# Altium PCB PCB1.PcbDoc
Units mil, origin at the board's own origin, x right, y up, seen from the top; angles counter-clockwise.
Board outline 6000 x 4000 mil, 2 copper layers (Top Layer, Bottom Layer); 8 components, 13 nets, 80 pads, 0 vias.
Unrouted connection lines stored in the file: 24.
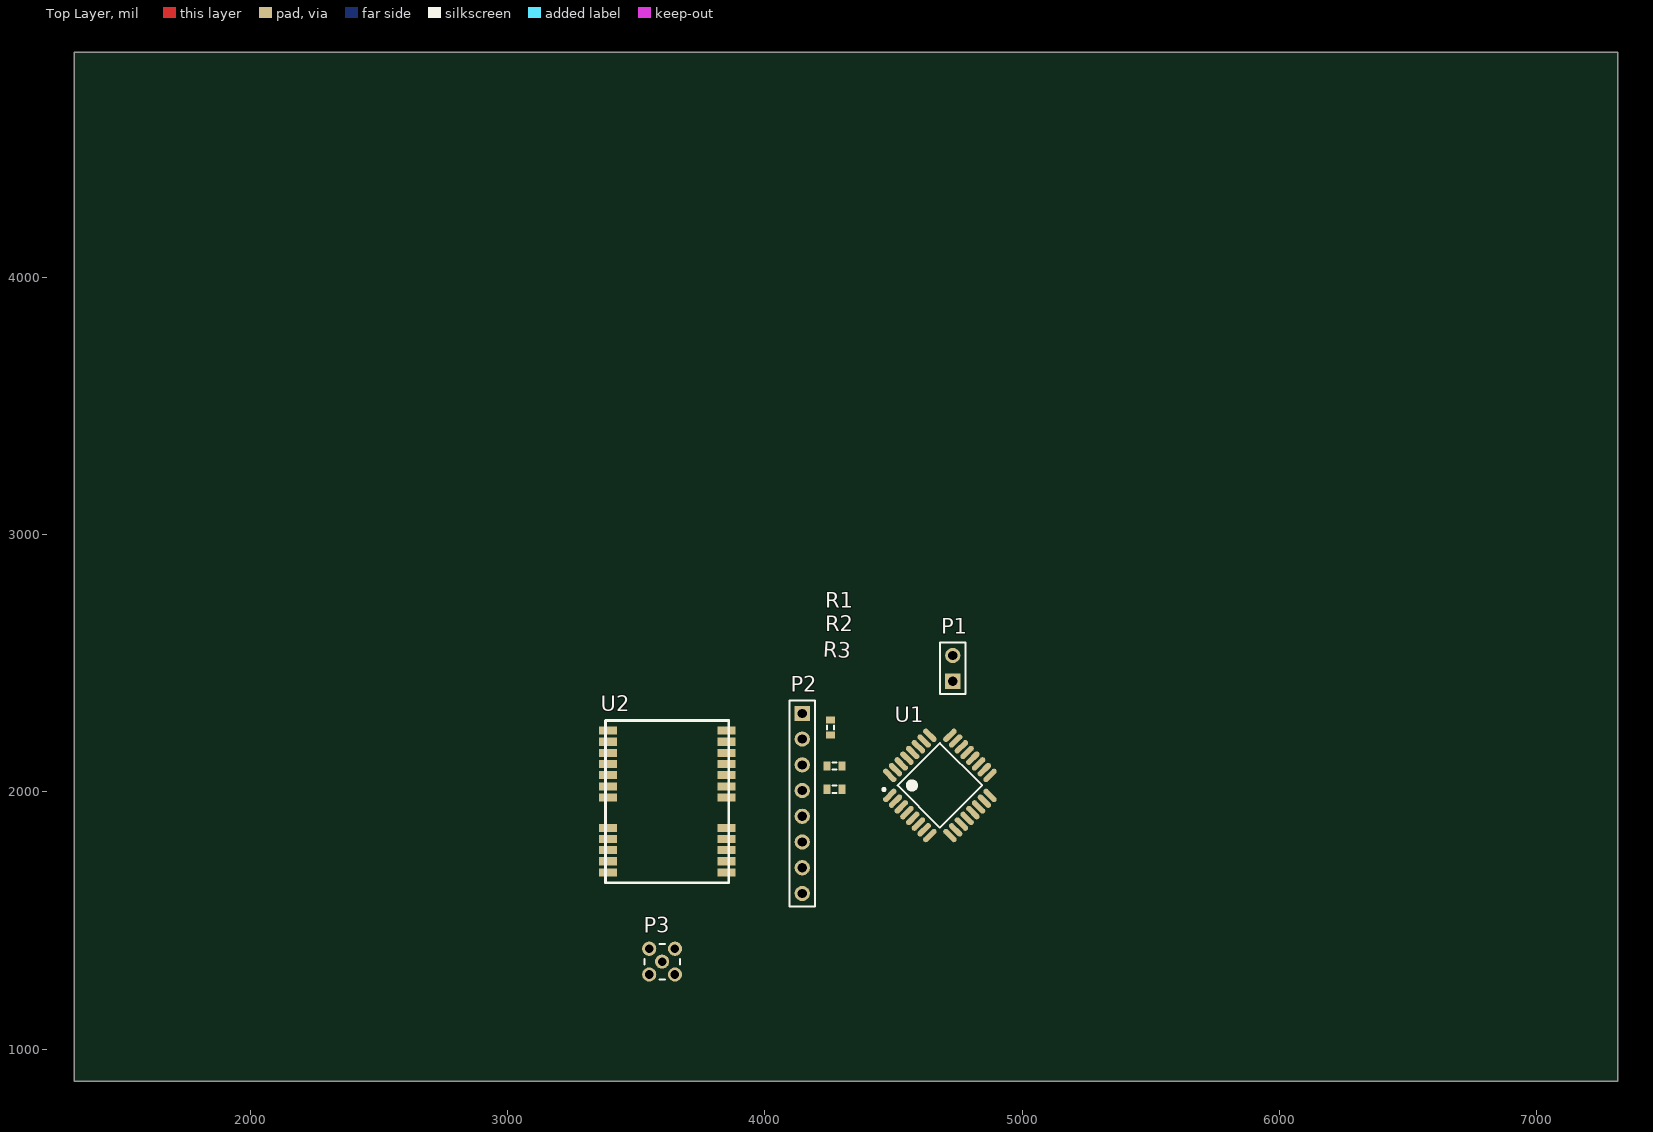
[diagram p0: Top Layer view]
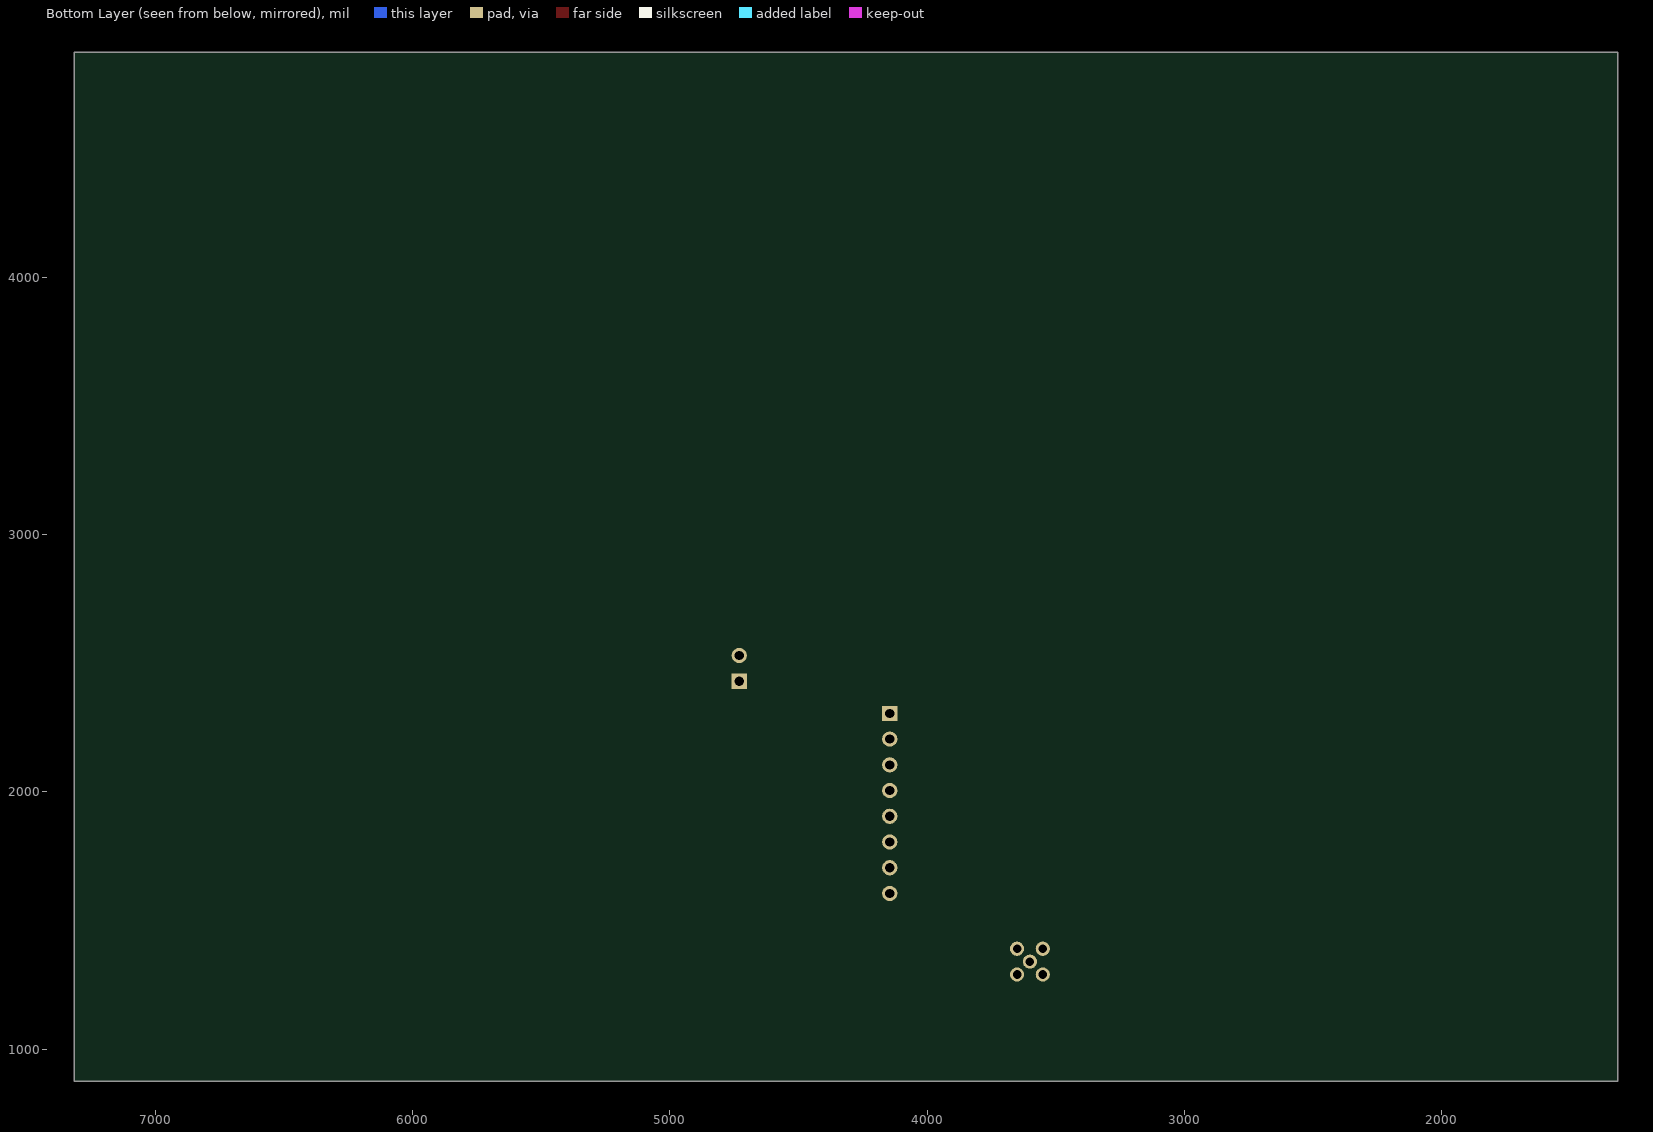
[diagram p1: Bottom Layer view, seen from below]

## Layer stack, top to bottom
Top Solder: solder mask 0.4, Solder Resist, Dk 3.5
Top Layer: signal copper 1.4
Dielectric 1: dielectric 12.6, FR-4, Dk 4.8
Bottom Layer: signal copper 1.4
Bottom Solder: solder mask 0.4, Solder Resist, Dk 3.5

## Board outline
1315,875 7315,875 7315,4875 1315,4875

## Design rules (kind name [scope] priority, off if disabled: settings)
Clearance [All] p1: gap=10 ignorepadtopadclearanceinfootprint=FALSE except(0: Arc-Hole Track-Hole SMDPad-Hole THPad-Hole Via-Hole Fill-Hole Poly-Hole Region-Hole Text-Hole)
PolygonConnect [All] p1: connectstyle=Relief reliefconductorwidth=10 reliefentries=4 polygonreliefangle="90 Angle" airgapwidth=10
RoutingVias [All] p1: holewidth=28 width=50 viastyle="Through Hole" minholewidth=28 minwidth=50 maxholewidth=28 maxwidth=50
SolderMaskExpansion [All] p1: expansion=4
Width [All] p1: maxlimit=10 minlimit=10 preferedwidth=10
30 further rules are at their usual default settings.

## Components (designator, comment, footprint, x,y, rotation, side; value= is the part's Value field where it differs from the comment)
P1 "Header 2" HDR1X2 4730,2430 r90 top
P2 "Programming" HDR1X8 4145,2305 r270 top
P3 "COAX-M" MMCX2.54-V5 3600,1340 r0 top
R1 "Res3" J1-0603 4255,2250 r270 top value=1K
R2 "Res3" J1-0603 4270,2100 r180 top value=1K
R3 "Res3" J1-0603 4270,2010 r180 top value=1K
U1 "ATmega8L-8AU" 32A_N 4680,2025 r45 top
U2 "uBlox NEO-6Q" NEO_6 3380,2277.32 r180 top

## Footprints (in the part's own frame and the unit in brackets; to place one, negate y for a bottom-side part, rotate by r counter-clockwise, add the part's x,y. Pads: shape width x height; smd on the part's side, far side on the other; paste and mask are expansions set on the pad)
32A_N [mm] "Thin QFP, 32-Leads, Body 7x7mm, Pitch 0.8mm, IPC Medium Density"
  oval 1.65x0.55 smd: 1(-4.2,2.8) 2(-4.2,2) 3(-4.2,1.2) 4(-4.2,0.4) 5(-4.2,-0.4) 6(-4.2,-1.2) 7(-4.2,-2) 8(-4.2,-2.8) 17(4.2,-2.8) 18(4.2,-2) 19(4.2,-1.2) 20(4.2,-0.4) 21(4.2,0.4) 22(4.2,1.2) 23(4.2,2) 24(4.2,2.8)
  oval 0.55x1.65 smd: 9(-2.8,-4.2) 10(-2,-4.2) 11(-1.2,-4.2) 12(-0.4,-4.2) 13(0.4,-4.2) 14(1.2,-4.2) 15(2,-4.2) 16(2.8,-4.2) 25(2.8,4.2) 26(2,4.2) 27(1.2,4.2) 28(0.4,4.2) 29(-0.4,4.2) 30(-1.2,4.2) 31(-2,4.2) 32(-2.8,4.2)
  silkscreen extent -4.32,-2.95 2.95,3.75, body extent -3.5,-3.5 3.5,3.5, height 1.2
HDR1X2 [mm] "Connector; Header; 2 Position"
  rect 1.5x1.5 hole 0.9: 1(0,0)
  round 1.5 hole 0.9: 2(2.54,0)
  silkscreen extent -1.27,-1.27 3.81,1.27
HDR1X8 [mm] "Connector; Header; 8 Position"
  rect 1.5x1.5 hole 0.9: 1(0,0)
  round 1.5 hole 0.9: 2(2.54,0) 3(5.08,0) 4(7.62,0) 5(10.16,0) 6(12.7,0) 7(15.24,0) 8(17.78,0)
  silkscreen extent -1.27,-1.27 19.05,1.27
J1-0603 [mm] "Chip Resistor, Body 1.6x0.8mm, IPC High Density"
  rect 0.7x0.9 smd: 1(-0.75,0) 2(0.75,0)
  silkscreen extent -0.2,-0.35 0.2,0.35, body extent -0.85,-0.48 0.85,0.48, height 0.9
MMCX2.54-V5 [mm] "Connector; RF Coaxial, MMCX, Thru-Hole; 5 Position; Vertical"
  round 1.4 hole 0.85: 1(0,0) 2(-1.27,-1.27) 3(1.27,-1.27) 4(1.27,1.27) 5(-1.27,1.27)
  silkscreen extent -1.75,-1.75 1.75,1.75
NEO_6 [mm]
  rect 1.8x0.8 smd: 1(-0.254,1) 2(-0.254,2.1) 3(-0.254,3.2) 4(-0.254,4.3) 5(-0.254,5.4) 6(-0.254,6.5) 7(-0.254,7.6) 8(-0.254,10.6) 9(-0.254,11.7) 10(-0.254,12.8) 11(-0.254,13.9) 12(-0.254,15) 13(-11.938,15) 14(-11.938,13.9) 15(-11.938,12.8) 16(-11.938,11.7) 17(-11.938,10.6) 18(-11.938,7.6) 19(-11.938,6.5) 20(-11.938,5.4) 21(-11.938,4.3) 22(-11.938,3.2) 23(-11.938,2.1) 24(-11.938,1)
  silkscreen extent -12.19,0 0,16

## Part data
P1: "Header, 2-Pin", LatestRevisionDate=17-Jul-2002, LatestRevisionNote="Re-released for DXP Platform.", Publisher="Altium Limited"
P2: library part "Header 8", "Header, 8-Pin", LatestRevisionDate=17-Jul-2002, LatestRevisionNote="Re-released for DXP Platform.", Publisher="Altium Limited"
P3: "RF Coaxial PCB Connector, MMCX; Thru-Hole, Vertical Mount Plug,  50 Ohm Impedance", PackageDocument="Rev. A, 16-Jun-1997", ComponentLink1Description="Manufacturer Link", ComponentLink1URL=http://www.amphenolrf.com/, DatasheetDocument=30-May-2003, DrillSize="Corresponds to nominal value.", LatestRevisionDate=15-Jul-2004, LatestRevisionNote="Component Replaced.", PackageReference=908-21103, PCB_Layout="Complies with manufacturer's recommendation.", Published=15-Jul-2004, Publisher="Altium Limited"
R1 R2 R3: "Resistor", LatestRevisionDate=29-May-2009, LatestRevisionNote="IPC-7351 Footprint Added.", PackageDescription="Chip Resistor", PackageReference=J1-0603, Published=8-Jun-2000, Publisher="Altium Limited"
U1: "8-bit AVR Microcontroller, 2.7-5.5V, 8MHz, 8KB Flash, 512 Bytes EEPROM, 1KB SRAM, 32-pin TQFP, Industrial Grade (-40°C to 85°C)", Code_JEDEC=MS-026-ABA, ComponentLink1Description="Manufacturer URL", ComponentLink1URL=http://www.atmel.com/, ComponentLink2Description=ATmega8(L), ComponentLink2URL=http://www.atmel.com/dyn/resources/prod_documents/doc2486.pdf, ComponentLink3Description="ATmega8(L) Summary", ComponentLink3URL=http://www.atmel.com/dyn/resources/prod_documents/2486S.pdf, DatasheetVersion="revZ, Feb-2011", PackageDescription="32-Lead, 7x7x1.0 mm Body, 0.8mm Lead Pitch, Thin Profile Plastic Quad Flat Package (TQFP)", PackageReference=32A, PackageVersion="revC, Oct-2010"

## Free pads (board coordinates)
  round 0 on Mech16 paste+0 mask+0: 1(1830,4220) 1(4215,1665) 1(4874.87,2063.97)

## Nets (pads, with @x,y where several pads share a name; then routed paths per layer and width w, separated by ;. In a path a pad name is that pad's centre, name@x,y a point inside that pad or via, vN(x,y) a via of type N, cw(c..) or ccw(c..) an arc to the next point about the centre after c; other vN are vias at no path point)
GND: P2.5 P3.2 P3.3 P3.4 P3.5 U1.3 U2.13
MISO: P2.7 U1.16
MOSI: P2.6 U1.15
NetP1_1: P1.1 U1.19
NetP1_2: P1.2 U1.22
NetR2_1: R2.1 U1.30
NetR3_1: R3.1 U1.31
RDX: P2.3 R2.2 U2.20
RESET: P2.2 R1.2 U1.29
RF_OUT: P3.1 U2.11
SCK: P2.8 U1.17
TDX: P2.4 R3.2 U2.21
VCC: P2.1 R1.1 U1.6 U1.18 U2.23
pads on no net: U1.1 U1.2 U1.4 U1.5 U1.7 U1.8 U1.9 U1.10 U1.11 U1.12 U1.13 U1.14 U1.20 U1.21 U1.23 U1.24 U1.25 U1.26 U1.27 U1.28 U1.32 U2.1 U2.2 U2.3 U2.4 U2.5 U2.6 U2.7 U2.8 U2.9 U2.10 U2.12 U2.14 U2.15 U2.16 U2.17 U2.18 U2.19 U2.22 U2.24